# Altium PCB PCB1.PcbDoc
Units mil, origin at the board's own origin, x right, y up, seen from the top; angles counter-clockwise.
Board outline 1850 x 1510 mil, 2 copper layers (Top Layer, Bottom Layer); 19 components, 16 nets, 61 pads, 3 vias.
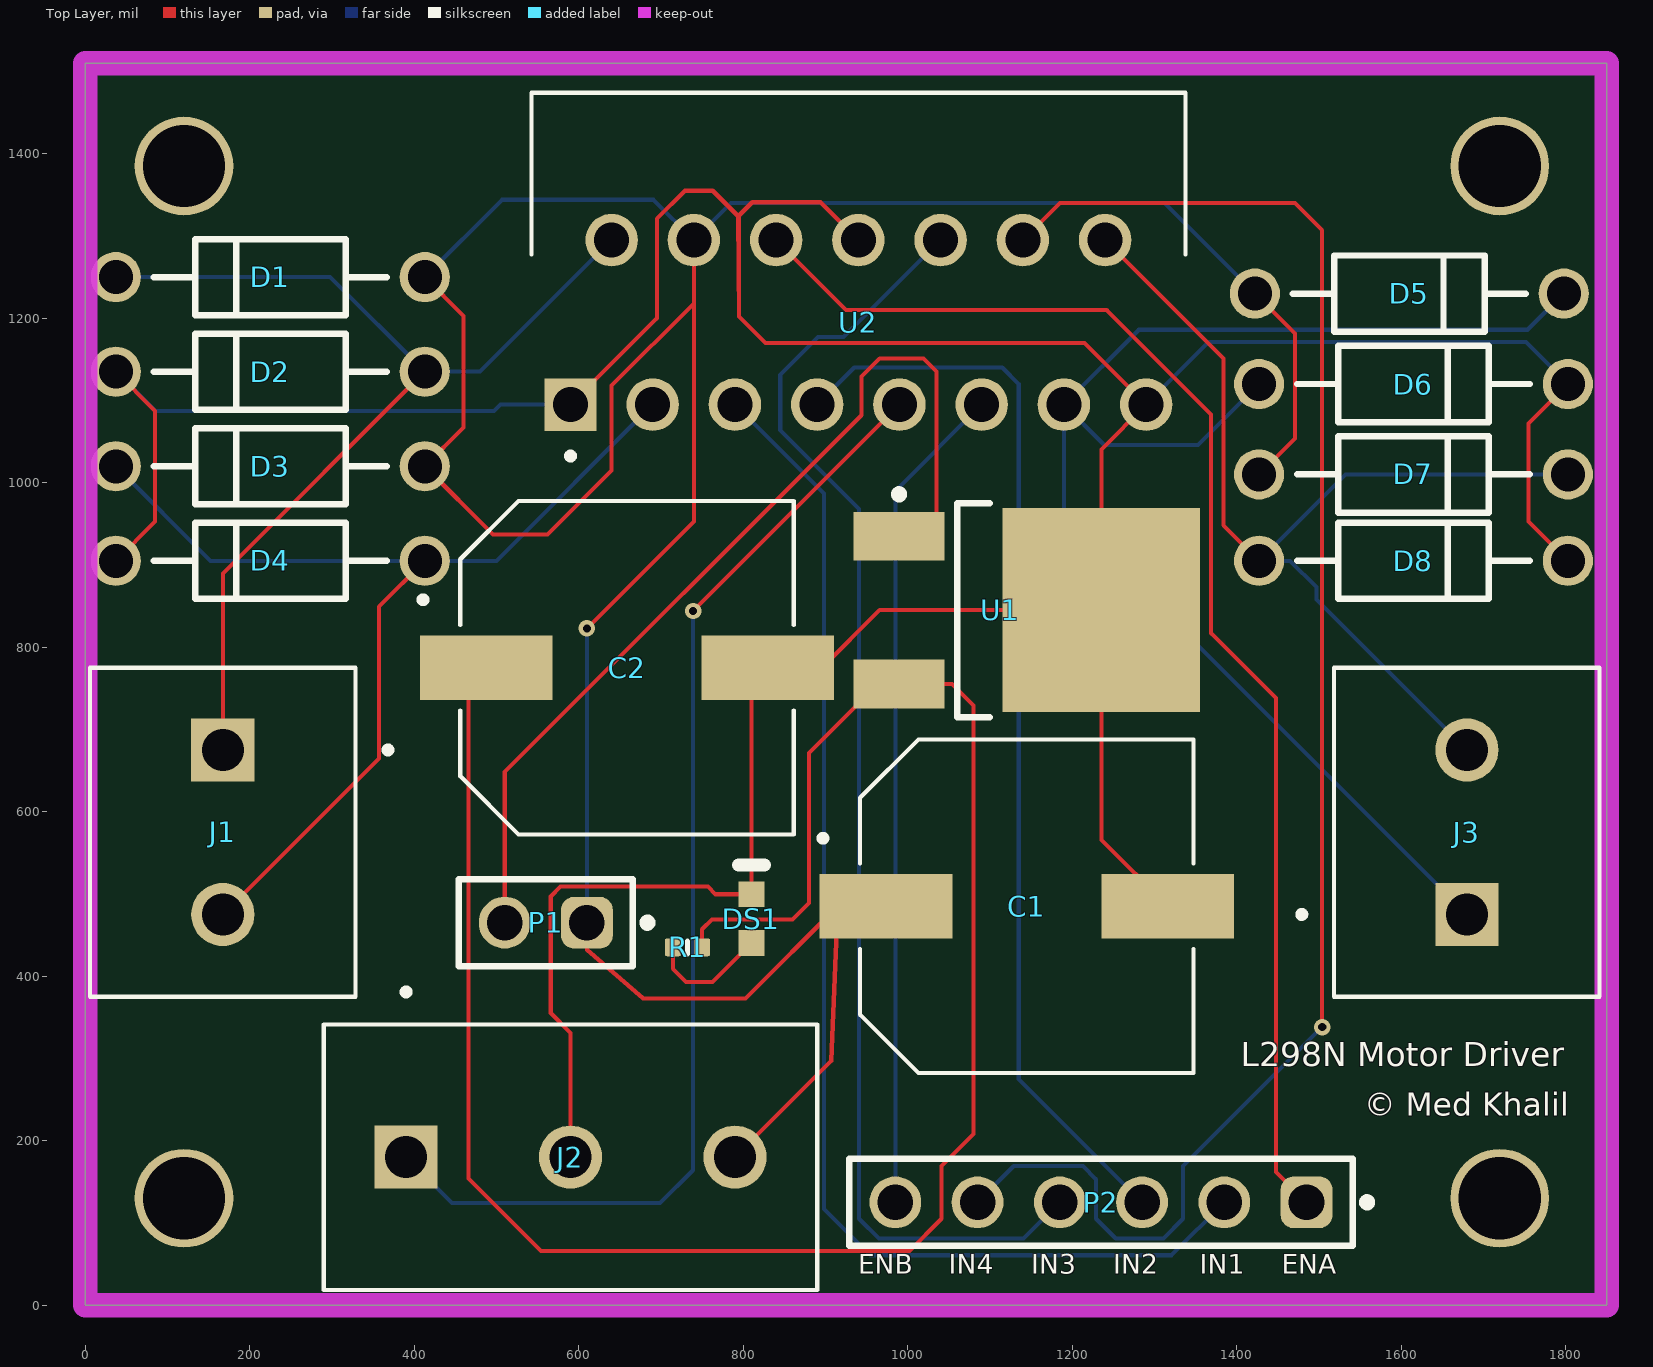
[diagram p0: Top Layer view]
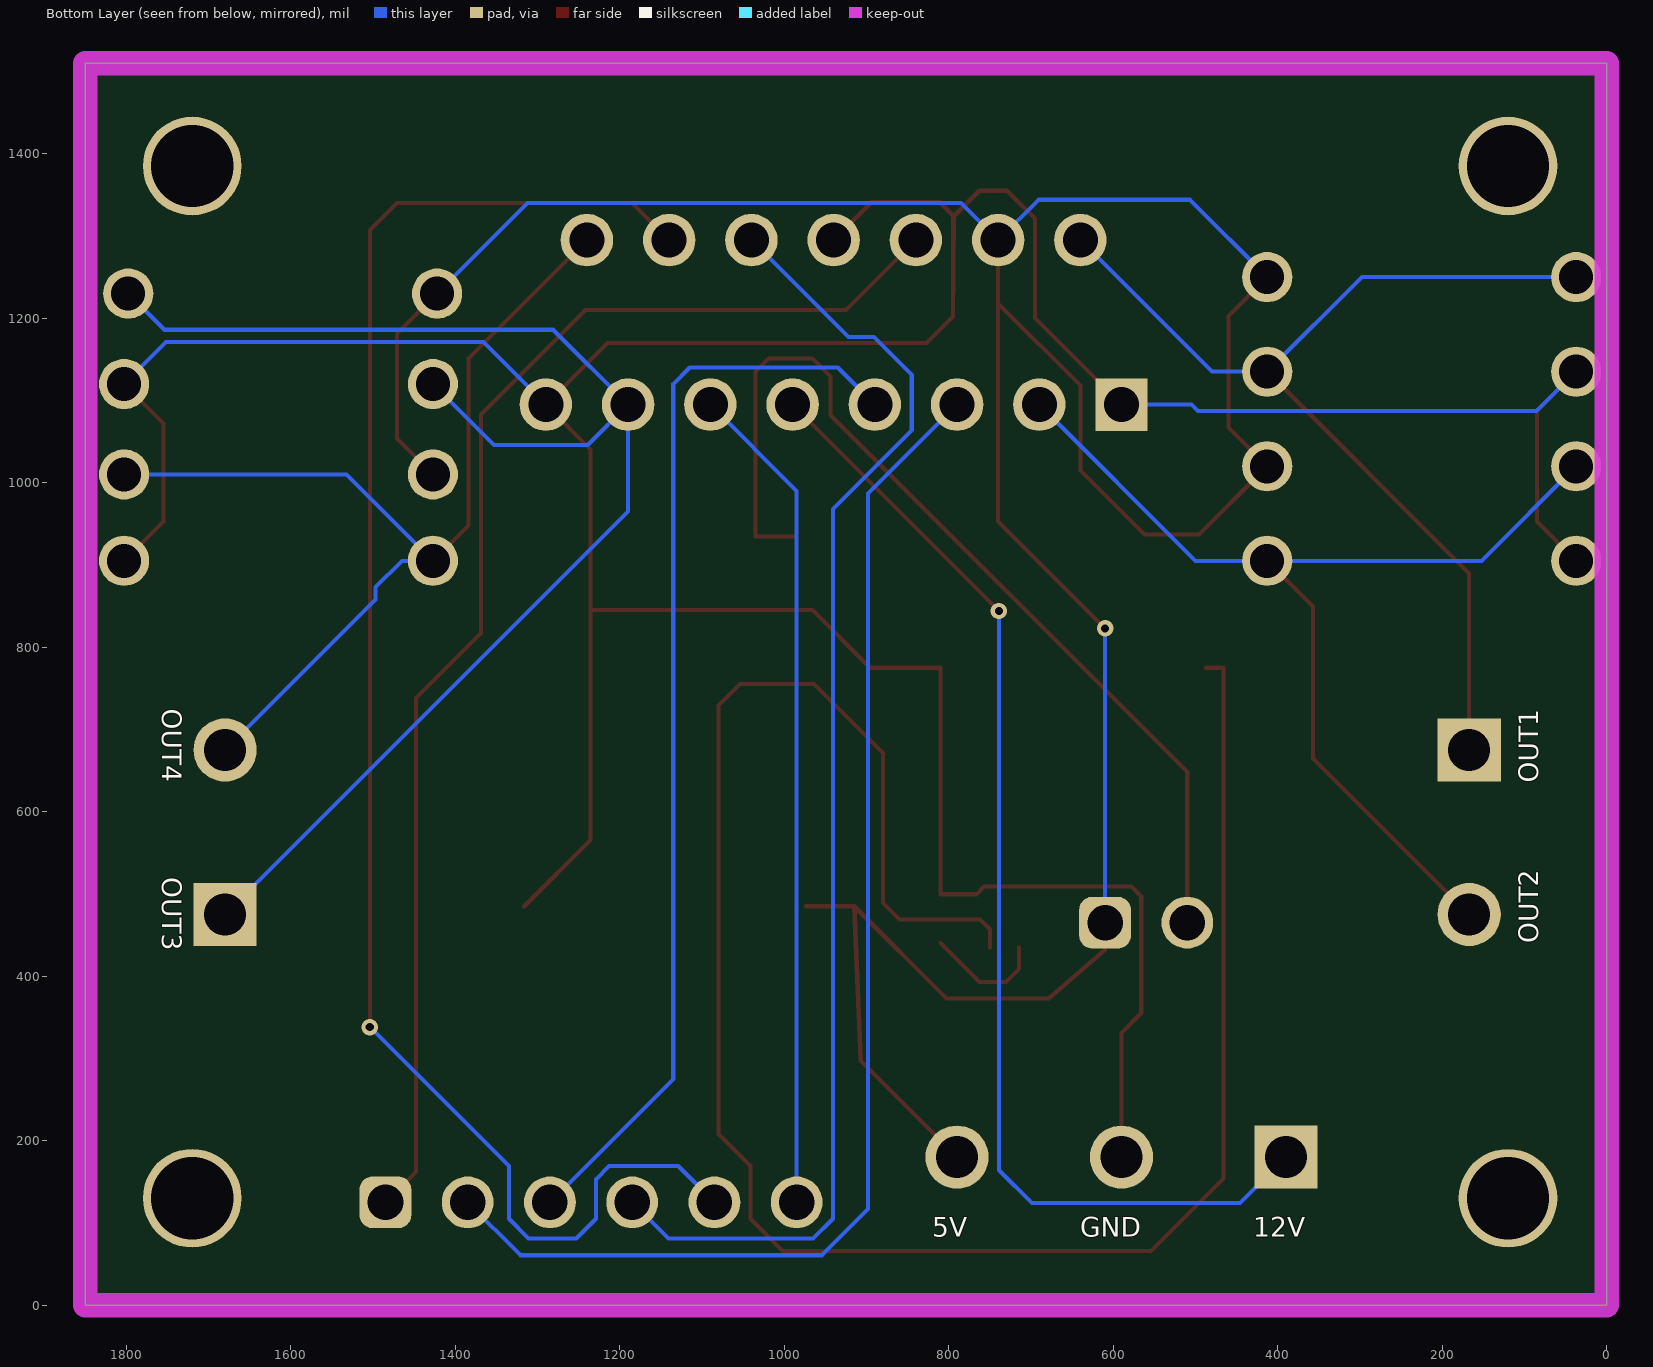
[diagram p1: Bottom Layer view, seen from below]
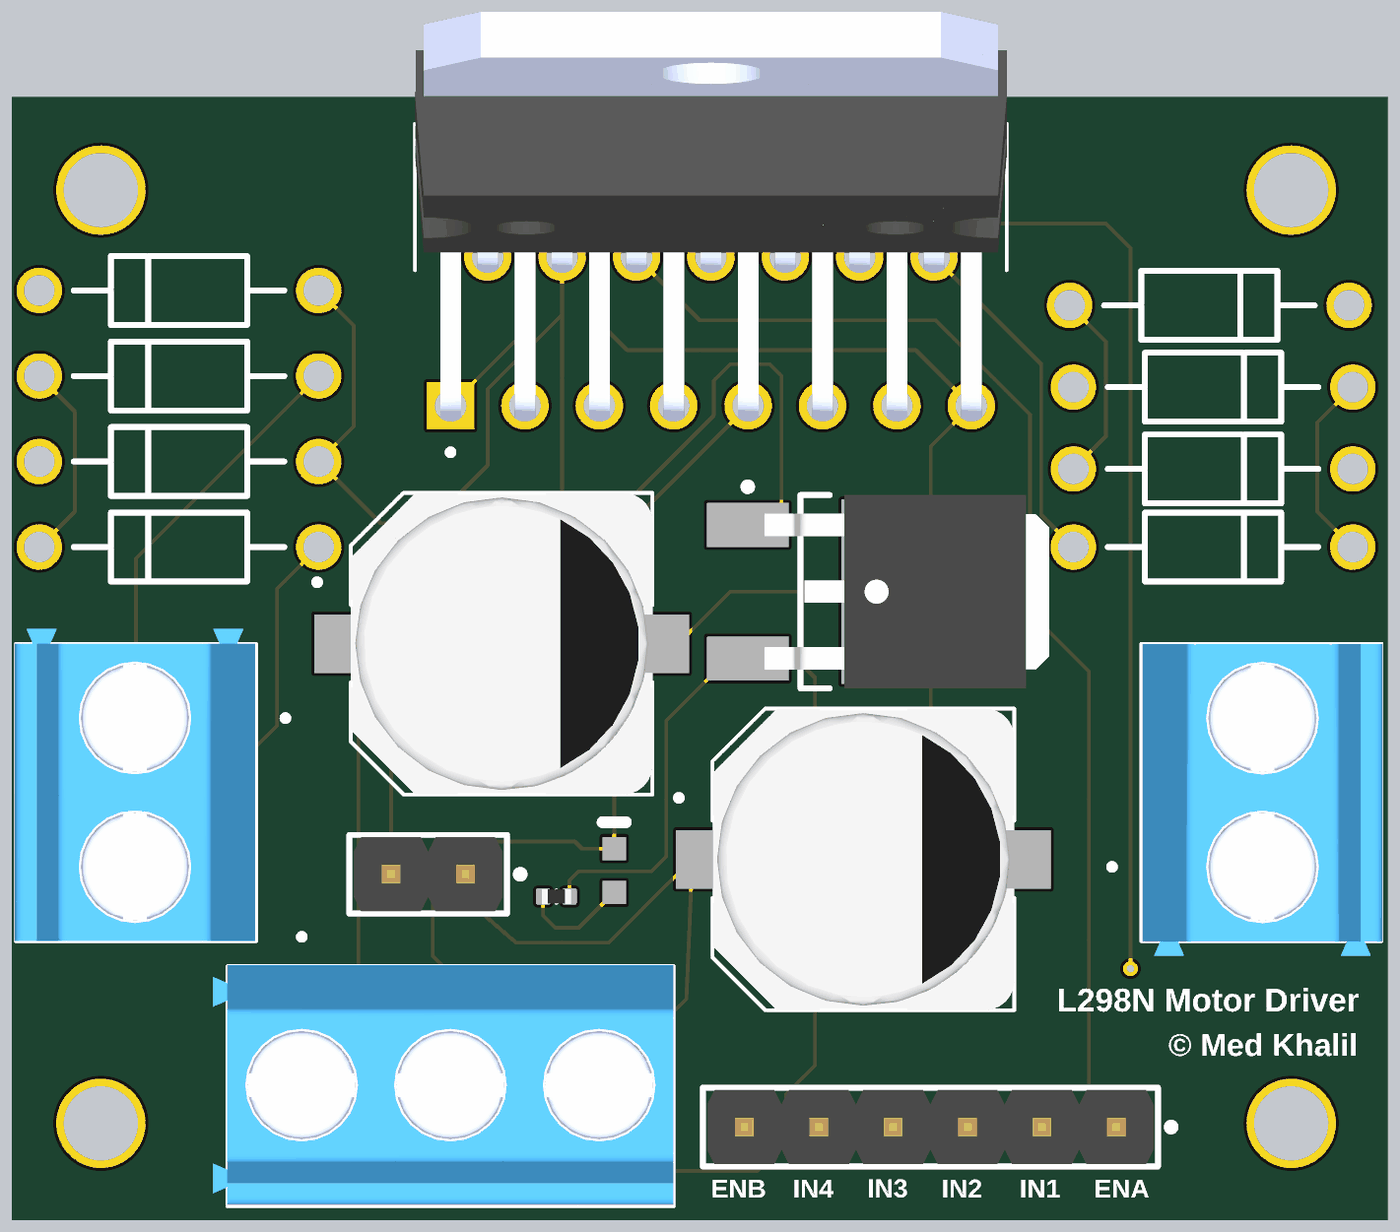
[diagram p2: 3D render of the assembled board from above, using the file's embedded part models]

## Layer stack, top to bottom
Top Solder: solder mask 0.4, Solder Resist, Dk 3.5
Top Layer: signal copper 1.4
Dielectric 1: dielectric 12.6, FR-4, Dk 4.8
Bottom Layer: signal copper 1.4
Bottom Solder: solder mask 0.4, Solder Resist, Dk 3.5

## Board outline
0,0 0,1510 1850,1510 1850,0

## Design rules (kind name [scope] priority, off if disabled: settings)
Clearance [All] p1: gap=10 ignorepadtopadclearanceinfootprint=FALSE
PolygonConnect [All] p1: connectstyle=Relief reliefconductorwidth=10 reliefentries=4 polygonreliefangle="90 Angle" airgapwidth=10
RoutingVias [All] p1: holewidth=10 width=20 viastyle="Through Hole" minholewidth=10 minwidth=20 maxholewidth=10 maxwidth=20
SolderMaskExpansion [All] p1: expansion=4 istentingtop=FALSE
SupplyNets "Schematic Supply Nets_2" [InNet('+5')] p1: voltage=0.000
SupplyNets "Schematic Supply Nets_1" [InNet('+12')] p2: voltage=0.000
SupplyNets "Schematic Supply Nets" [InNet('GND')] p3: voltage=0.000
Width [All] p1: maxlimit=5 minlimit=5 preferedwidth=5 minimp=50.000000 maximp=50.000000 favimp=50.000000
30 further rules are at their usual default settings.

## Components (designator, comment, footprint, x,y, rotation, side; value= is the part's Value field where it differs from the comment)
C1 "EEEHA1V221AP" CAP_EEEHA1V221AP 1145,485 r0 top
C2 "EEEHA1V221AP" CAP_EEEHA1V221AP 658.74,775 r0 top
D1 "1N5819" ONSC-AXIAL_LEAD-2-59-10_P 225,1250 r0 top
D2 "1N5819" ONSC-AXIAL_LEAD-2-59-10_P 225,1135 r0 top
D3 "1N5819" ONSC-AXIAL_LEAD-2-59-10_P 225,1020 r0 top
D4 "1N5819" ONSC-AXIAL_LEAD-2-59-10_P 225,905 r0 top
D5 "1N5819" ONSC-AXIAL_LEAD-2-59-10_P 1610,1230 r180 top
D6 "1N5819" ONSC-AXIAL_LEAD-2-59-10_P 1615,1120 r180 top
D7 "1N5819" ONSC-AXIAL_LEAD-2-59-10_P 1615,1010 r180 top
D8 "1N5819" ONSC-AXIAL_LEAD-2-59-10_P 1615,905 r180 top
DS1 "HSMH-C190" AVAG-HSMX-C190_V 810,470 r90 top
J1 "TB006-508-02BE" CUI_TB006-508-02BE 167.24,675 r270 top
J2 "TB006_-508-03BE" "CUI_TB006 -508-03BE" 390,180 r0 top
J3 "TB006-508-02BE" CUI_TB006-508-02BE 1680,475 r90 top
P1 "61300211121" 61300211121 560,465 r180 top
P2 "61300611121" 61300611121 1235,125 r180 top
R1 "Resistor 1K +/-5 % 0402 63 mW" RESC0402(1005)_L 732.28,435 r0 top value=1k
U1 "L78M05CDT" STM-TO252-3_A_V 1145,845 r0 top
U2 "L298N" TO127P2020X500X2100-15 590,1095 r90 top

## Footprints (in the part's own frame and the unit in brackets; to place one, negate y for a bottom-side part, rotate by r counter-clockwise, add the part's x,y. Pads: shape width x height; smd on the part's side, far side on the other; paste and mask are expansions set on the pad)
61300211121 [mm] "Pin Header, pitch 2.54 mm, THT, Vertical, single row, 2p"
  rrect50% 1.6x1.6 hole 1.1: 1(-1.27,0)
  round 1.6 hole 1.1: 2(1.27,0)
  silkscreen extent -3.26,-1.34 2.69,1.34, body extent -2.54,-1.27 2.54,1.27, height 8.57
61300611121 [mm] "Pin Header, pitch 2.54 mm, THT, Vertical, single row, 6p"
  rrect50% 1.6x1.6 hole 1.1: 1(-6.35,0)
  round 1.6 hole 1.1: 2(-3.81,0) 3(-1.27,0) 4(1.27,0) 5(3.81,0) 6(6.35,0)
  silkscreen extent -8.34,-1.34 7.77,1.34, body extent -7.62,-1.27 7.62,1.27, height 8.57
AVAG-HSMX-C190_V [mm] "SMD, 2-Leads, Body 1.6x0.8mm, Height 0.9mm"
  rect 0.8x0.8 smd: 1(-0.75,0) 2(0.75,0)
  silkscreen extent 1.65,-0.4 1.65,0.4, body extent -0.8,-0.4 0.8,0.4, height 0.9
CAP_EEEHA1V221AP [mm]
  rect 4.1x2 smd: 1(-4.35,0) 2(4.35,0)
  silkscreen extent -6.4,-5.15 5.15,5.15, body extent -5.85,-5.15 5.85,5.15, height 9.3
"CUI_TB006 -508-03BE" [mm]
  rect 1.95x1.95 / inner round 1.95 / far side rect 1.95x1.95 hole 1.3: 1(0,0)
  round 1.95 hole 1.3: 2(5.08,0) 3(10.16,0)
  silkscreen extent -2.54,-4.1 12.7,5.2, body extent -3.04,-4.06 12.7,4.14, height 10.01
CUI_TB006-508-02BE [mm]
  rect 1.95x1.95 / inner round 1.95 / far side rect 1.95x1.95 hole 1.3: 1(0,0)
  round 1.95 hole 1.3: 2(5.08,0)
  silkscreen extent -2.54,-4.1 7.62,5.2, body extent -3.04,-4.14 7.62,4.06, height 10
ONSC-AXIAL_LEAD-2-59-10_P [mm] "AXIAL, 2-Leads, Diameter 2.35mm"
  round 1.55 hole 1.05: 1(-4.77,0) 2(4.77,0)
  silkscreen extent -3.6,-1.18 3.6,1.18, body extent -5.16,-1.17 5.16,1.17, height 2.34
RESC0402(1005)_L [mm] "Chip Resistor, Body 1.0x0.5mm, IPC High Density"
  rrect25% 0.5x0.55 smd: 1(-0.45,0) 2(0.45,0)
  silkscreen extent 0,-0.2 0,0.2, body extent -0.5,-0.25 0.5,0.25, height 0.3
STM-TO252-3_A_V [mm] "D-PAK, 3-Leads, Body 6.20x6.60mm, Pitch 2.28mm"
  rect 2.8x1.5 smd: 1(-3.95,2.28) 3(-3.95,-2.28)
  rect 6.1x6.3 smd: 4(2.3,0)
  silkscreen extent -4.07,-3.3 -1.15,3.7, body extent -3.37,-3.3 6.35,3.3, height 2.43
TO127P2020X500X2100-15 [mm]
  rect 1.62x1.62 hole 1.08: 1(0,0)
  round 1.62 hole 1.08: 2(5.08,-1.27) 3(0,-2.54) 4(5.08,-3.81) 5(0,-5.08) 6(5.08,-6.35) 7(0,-7.62) 8(5.08,-8.89) 9(0,-10.16) 10(5.08,-11.43) 11(0,-12.7) 12(5.08,-13.97) 13(0,-15.24) 14(5.08,-16.51) 15(0,-17.78)
  silkscreen extent -1.69,-18.99 9.63,1.21, body extent -1.08,-18.99 13.46,1.21, height 20.18

## Part data
C1 C2: "220ÂµF 35V Aluminum Electrolytic Capacitors Radial, Can - SMD 1000 Hrs @ 105Â°C", Package="RADIAL-2 Panasonic", Availability="In Stock", Check_prices=https://www.snapeda.com/parts/EEE-HA1V221AP/Panasonic/view-part/?ref=eda, MF=Panasonic, MP=EEE-HA1V221AP, Price=None, Purchase-URL=https://pricing.snapeda.com/search/part/EEE-HA1V221AP/?ref=eda, SnapEDA_Link=https://www.snapeda.com/parts/EEE-HA1V221AP/Panasonic/view-part/?ref=snap
D1 D2 D3 D4 D5 D6 D7 D8: library part CMP-004-00009-2, "Low Drop Power Schottky Rectifier, 40 V, 1 A, 2-Pin DO-41, RoHS", Case/Package=DO, Forward Current=1A, Manufacturer="ON Semiconductor", Max Operating Temperature=125°C, Max Surge Current=25A, Min Operating Temperature=-65°C, Package Description="2-Pin, Axial Lead, Diameter 2.35 mm", Package Reference=AXIAL_LEAD-2-59-10, Package Version="Rev. U, 02/2005", Peak Reverse Current=1mA, Datasheet URL=http://www.onsemi.cn/pub_link/Collateral/1N5817-D.PDF, Datasheet Version="Rev. 10, 07/2006", Manufacturer URL=http://www.onsemi.com/, Mounting Technology=TH, Package URL=http://www.onsemi.cn/pub_link/Collateral/59-10.PDF, Packaging=Bulk, Pins=2, RoHS Compliant=True
DS1: library part CMP-007-00014-2, "LED Uni-Color Red, 65 mW, 20 mA, -40 to 85 degC, 2-Pin SMD, RoHS, Tape and Reel", Case/Package=0603, Colour=Red, Forward Current=20mA, Forward Voltage=1.8V, Manufacturer=Avago, Max Operating Temperature=85°C, Min Operating Temperature=-40°C, Package Description="2-Pin Surface Mount Device, Body 1.6 x 0.8 mm, Height 0.9 mm", Package Quantity=4000, Package Reference=HSMX-C190, Power=78mW, Datasheet URL=http://docs.avagotech.com/docs/AV02-0551EN, Datasheet Version=Mar-12, Illumination Colour=Red, Lens Style=Diffused, Luminous Intensity=17mcd, Manufacturer URL=http://www.avagotech.com/, Mounting Technology=SM, Nominal Vf=1.8V, Packaging=TapeandReel, Pins=2, RoHS Compliant=True, Viewing Angle=170degrees
J1 J2 J3: "2~24 Poles, Screw Type, Horizontal, 5.08 Pitch, 26~14 (AWG), Terminal Block Connector", Package=None
  J1 J3: Check_prices=https://www.snapeda.com/parts/TB006-508-02BE/Same+Sky/view-part/?ref=eda, MF="Same Sky", MP=TB006-508-02BE, SnapEDA_Link=https://www.snapeda.com/parts/TB006-508-02BE/Same+Sky/view-part/?ref=snap
  J2: Availability="In Stock", Check_prices=https://www.snapeda.com/parts/TB006%20-508-03BE/CUI+Devices/view-part/?ref=eda, CUI_purchase_URL=https://www.cuidevices.com/product/interconnect/connectors/terminal-blocks/tb006-508-series?utm_source=snapeda.com&utm_medium=referral&utm_campaign=snapedaBOM, MF="CUI Devices", MP="TB006 -508-03BE", Price=None, Purchase-URL="https://pricing.snapeda.com/search/part/TB006 -508-03BE/?ref=eda", SnapEDA_Link=https://www.snapeda.com/parts/TB006%20-508-03BE/CUI+Devices/view-part/?ref=snap
P1: library part CMP-1712-00002-6, Color=Black, Contact Resistance=20mΩ, Current Rating=3A, Max Operating Temperature=125°C, Min Operating Temperature=-40°C, Operating Supply Voltage=250V, Connector Type="Male Pin", Contact Gender=Male, Contact Material=Copper, Contact Mating Length=5.9944mm, Contact Plating=Gold, Gender=Male, Height=8.94mm, Housing Material=PBT, Lead Free="Lead Free", Lead Pitch=2.54mm, Mount="Through Hole", NexarPartId=20081794, Number of Contacts=2, Number of Pins=2, Number of Positions=2, Number of Rows=1, Orientation=Vertical, Packaging=Bulk, Pitch=2.54mm, REACH SVHC="No SVHC", RoHS=Compliant, Termination="Through Hole", Voltage Rating=250V
P2: library part CMP-1502-01070-3, Color=Black, Contact Resistance=20mΩ, Current Rating=3A, Max Operating Temperature=105°C, Min Operating Temperature=-40°C, Operating Supply Voltage=250V, Connector Type="Male Pin", Contact Gender=Male, Contact Material=Copper, Contact Mating Length=5.9944mm, Contact Plating=Gold, Gender=Male, Height=8.89mm, Housing Material=PBT, Lead Free="Lead Free", Lead Pitch=2.54mm, Mount="Through Hole", NexarPartId=20084590, Number of Contacts=6, Number of Pins=6, Number of Positions=6, Number of Rows=1, Orientation=Vertical, Packaging=Bulk, Pitch=2.54mm, REACH SVHC=Unknown, RoHS=Compliant, Termination="Through Hole", Voltage Rating=250V
R1: library part CMP-009-00157-3, "Chip Resistor, 1 kOhms, +/-5 %, 63 mW, -55 to 155 degC, 0402", Case/Package=0402, Max Operating Temperature=155°C, Min Operating Temperature=-55°C, Power=63mW, Tolerance=5%, Pins=2
U1: library part CMP-2000-06530-1, "Precision Regulator, 0.5 A, 5 V Output, 0 to 150 degC, 3-Pin DPAK (TO252), RoHS, Tube", Input Voltage Max=35V, Input Voltage Min=10V, Linear Regulator Case Style=TO-252, Manufacturer=STMicroelectronics, Operating Temperature Max=150°C, Operating Temperature Min=0°C, Output Current=500mA, Output Voltage Nom.=5V, Package Description="3-Pin Transistor Outline, Body 6.5 x 6.1 mm, Pitch 2.28 mm", Package Reference=TO252, Datasheet URL=http://www.st.com/content/ccc/resource/technical/document/datasheet/d7/5f/dc/5c/d5/b6/48/7c/CD00000447.pdf/files/CD00000447.pdf/jcr:content/translations/en.CD00000447.pdf, Datasheet Version="Rev. 20, 06/2014", Manufacturer URL=http://www.st.com/, Mounting Technology=SurfaceMount, No. of Pins=3Pins, Packaging=Each, SVHC=NoSVHC(17-Dec-2015)
U2: "Dual Full Bridge Motor Driver 15-Pin(15+Tab) MULTIWATT V Tube", Package=None, Availability=Unavailable, MP=L298N, Price=None

## Free pads (board coordinates)
  round 120 hole 100: 18(120,130) 18(120,1385) 18(1720,130) 18(1720,1385)

## Via types
v1: diameter 20, hole 10, Top Layer to Bottom Layer, 3 vias

## Nets (pads, with @x,y where several pads share a name; then routed paths per layer and width w, separated by ;. In a path a pad name is that pad's centre, name@x,y a point inside that pad or via, vN(x,y) a via of type N, cw(c..) or ccw(c..) an arc to the next point about the centre after c; other vN are vias at no path point)
+5: J2.1 U2.9 | length 1423.7
  Top Layer w5: v1(739,844) U2.9
  Bottom Layer w5: J2.1 446,124 699,124 739,164 v1(739,844)
+12: C1.1 D1.2 D3.2 D5.2 D7.2 J2.3 P1.1 U2.4 | length 3901.3
  Top Layer w5: D1.2 460,1202.8 460,1067.2 D3.2 495.8,937 562,937 640,1015 640,1118 740,1218 ; P1.1 610,432 678,373 803,373 C1.1@915,485 ; v1(610,822.8) 740,952.8 740,1218 ; U2.4 740,1218 ; J2.3 907,297 C1.1@915,485 ; C1.1 C1.1@915,485 ; D5.2 1471,1181.2 1471,1053.8 D7.2
  Bottom Layer w5: D1.2 506.8,1344 691,1344 U2.4 785,1340 1312.2,1340 D5.2 ; P1.1 v1(610,822.8)
ENA: P2.1 U2.6 | length 1622.9
  Top Layer w5: U2.6 925,1210 1242,1210 1369,1083 1369,817 1448,738 1448,162 P2.1
ENB: P2.6 U2.11 | length 1013.5
  Bottom Layer w5: P2.6 985,990 U2.11
GND: C1.2 C2.2 D2.1 D4.1 D6.1 D8.1 DS1.2 J2.2 U1.4 U2.1 U2.8 U2.15 | length 4992.7
  Top Layer w5: D4.1 85,952.8 85,1087.2 D2.1 ; J2.2 590,331 566,355 566,497 578,509 757,509 766.47,499.53 DS1.2 810,775 C2.2 896,775 966,845 U1.4 ; U2.1 695,1200 695,1321 729,1355 763,1355 794,1324 ; U2.8 894,1341 811,1341 794,1324 ; C1.2 1235.55,565.71 U1.4 ; D8.1 1755,952.8 1755,1072.2 D6.1 ; 794,1324 795,1323 795,1202 ; 794,1324 795,1202 ; 795,1202 827,1170 1215,1170 U2.15 1235.55,1040.55 U1.4
  Bottom Layer w5: D2.1 85.2,1087 497,1087 505,1095 U2.1 ; U2.15 1366,1171 1751.8,1171 D6.1
IN1: P2.2 U2.5 | length 1559.7
  Bottom Layer w5: U2.5 898.03,986.97 898.03,116.97 954.34,60.66 1320.66,60.66 P2.2
IN2: P2.3 U2.7 | length 1329.1
  Bottom Layer w5: U2.7 935,1140 1115,1140 1135,1120 1135,275 P2.3
IN3: P2.4 U2.10 | length 1600.9
  Bottom Layer w5: U2.10 922,1177 891,1177 845,1131 845,1064 941,968 941,105 965,81 1141,81 P2.4
IN4: P2.5 U2.12 | length 2011
  Top Layer w5: U2.12 1185,1340 1471,1340 1504,1307 v1(1504,338)
  Bottom Layer w5: P2.5 1129,169 1213,169 1229,153 1229,105 1253,81 1311,81 1335,105 1335,169 v1(1504,338)
NetC2_1: C2.1 R1.2 U1.3 | length 2503.4
  Top Layer w5: C2.1 466,775 466,154 554,66 1002,66 1041,105 1041,169 1080,208 1080,729 1053.76,755.24 U1.3 964,755.24 880,671.24 880,489 860,469 762,469 750,457 R1.2
NetDS1_1: DS1.1 R1.1 | length 147.7
  Top Layer w5: R1.1 714.57,408.95 730.52,393 762.52,393 DS1.1
NetP1_2: P1.2 U1.1 | length 1196.3
  Top Layer w5: P1.2 510,648 944,1082 944,1129 966,1151 1019,1151 1035,1135 1035,934.76 U1.1
OUT1: D1.1 D2.2 J1.1 U2.2 | length 1278.4
  Top Layer w5: J1.1 167.24,889.45 D2.2
  Bottom Layer w5: D1.1 297.8,1250 D2.2 480,1135 U2.2
OUT2: D3.1 D4.2 J1.2 U2.3 | length 1310.8
  Top Layer w5: J1.2 357,664.76 357,849.2 D4.2
  Bottom Layer w5: D3.1 152.2,905 D4.2 500,905 U2.3
OUT3: D5.1 D6.2 J3.1 U2.13 | length 1774.8
  Bottom Layer w5: D6.2 1353.2,1046 1239,1046 U2.13 ; J3.1 1190,965 U2.13 ; D5.1 1753.8,1186 1281,1186 U2.13
OUT4: D7.1 D8.2 J3.2 U2.14 | length 1243.5
  Top Layer w5: U2.14 1384,1151 1384,948.2 D8.2
  Bottom Layer w5: J3.2 1497,858 1497,873 1465,905 D8.2 1532.2,1010 D7.1

## Keep-outs
Keep-Out Layer:
  the board outline again, w30

## Silkscreen, mask and mechanical layers (free items; w line width, h text height)
Top Overlay:
  text "L298N Motor Driver" at 1405,280.6 h50
  text "© Med Khalil" at 1555,220.75 h48
  text "ENB" at 940,30 h40
  text "IN4" at 1050,30 h40
  text "IN3" at 1150,30.48 h40
  text "IN2" at 1250,30 h40
  text "IN1" at 1355,30 h40
  text "ENA" at 1455,30 h40
Bottom Overlay:
  text "OUT4" at 1764.52,725 h40 r90
  text "OUT1" at 75.48,635 h40 r270
  text "OUT3" at 1764.52,520 h40 r90
  text "OUT2" at 75.48,440 h40 r270
  text "12V" at 430,75 h40
  text "GND" at 640,75.48 h40
  text "5V" at 820,75.48 h40